# Altium PCB HD1772.pcbdoc
Units mm, origin at the board's own origin, x right, y up, seen from the top; angles counter-clockwise.
Board outline 21.34 x 39.62 mm, 2 copper layers (TopLayer, BottomLayer), stack 1.572 mm thick; 8 components, 31 nets, 81 pads, 9 vias.
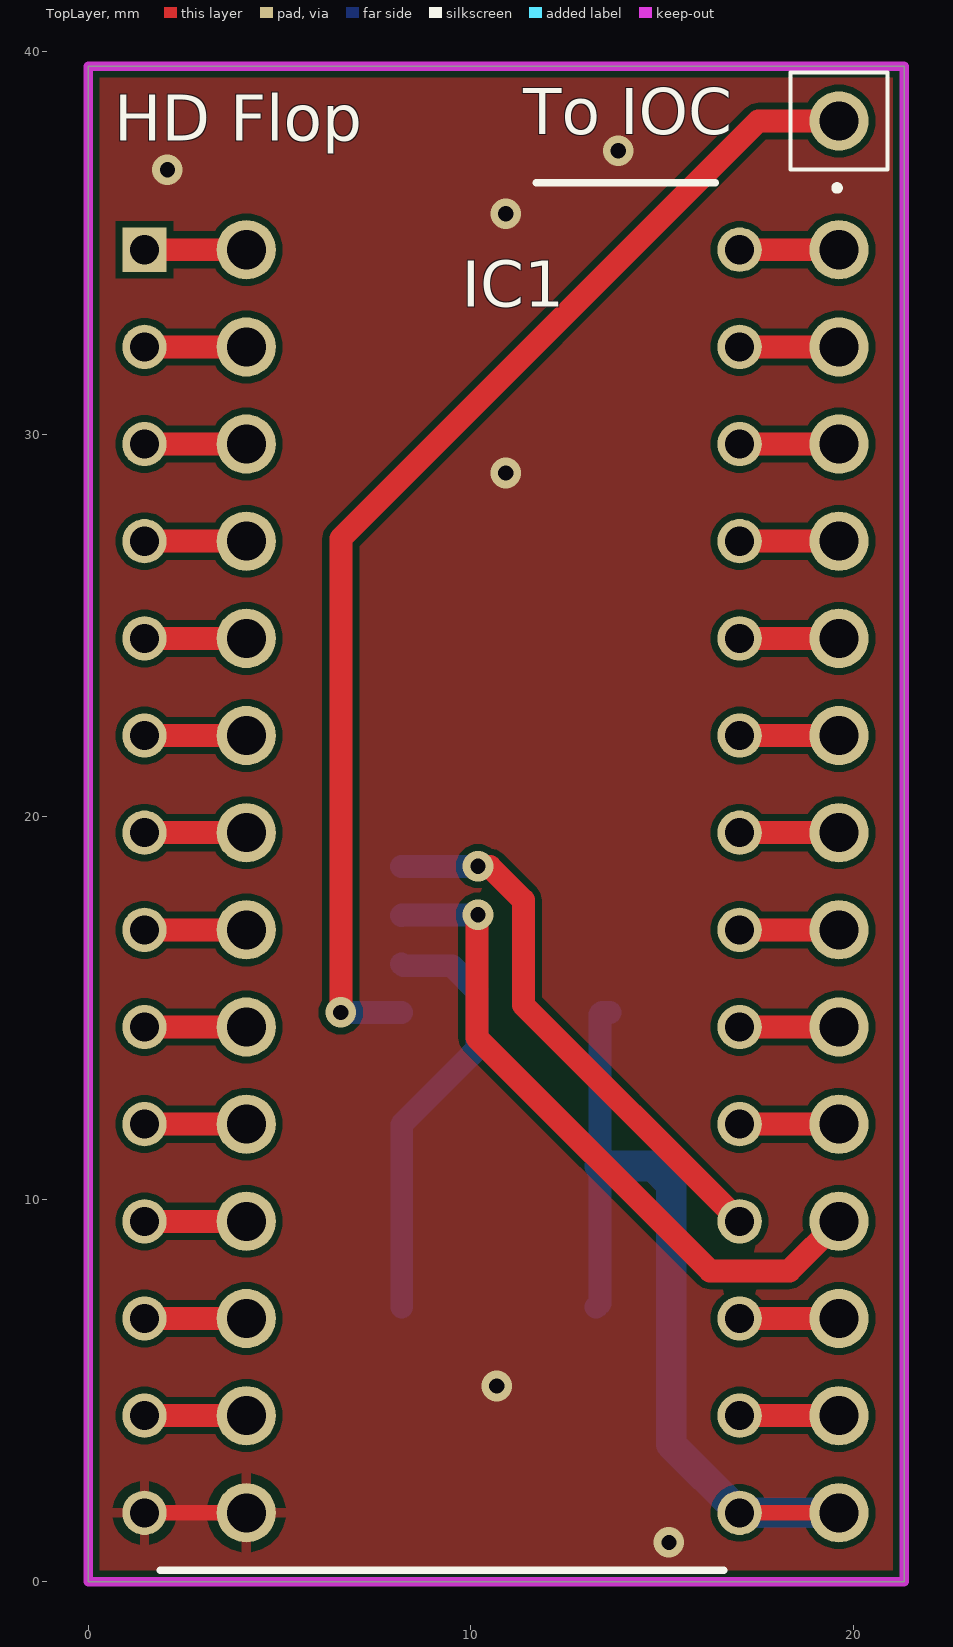
[diagram p0: TopLayer view]
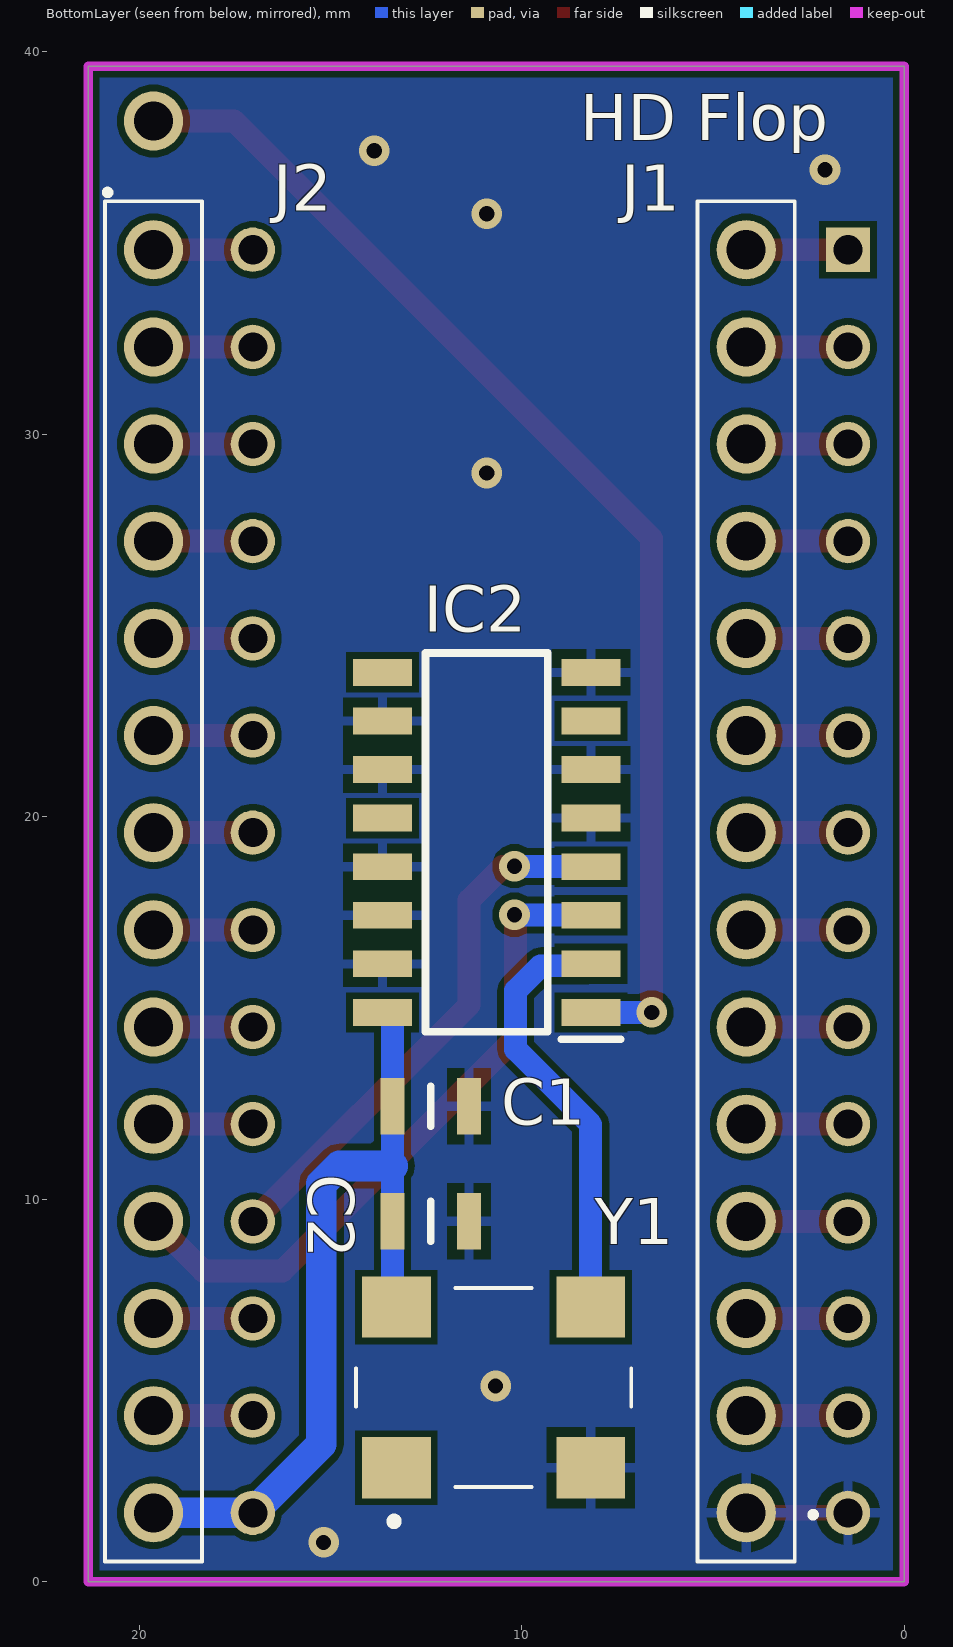
[diagram p1: BottomLayer view, seen from below]
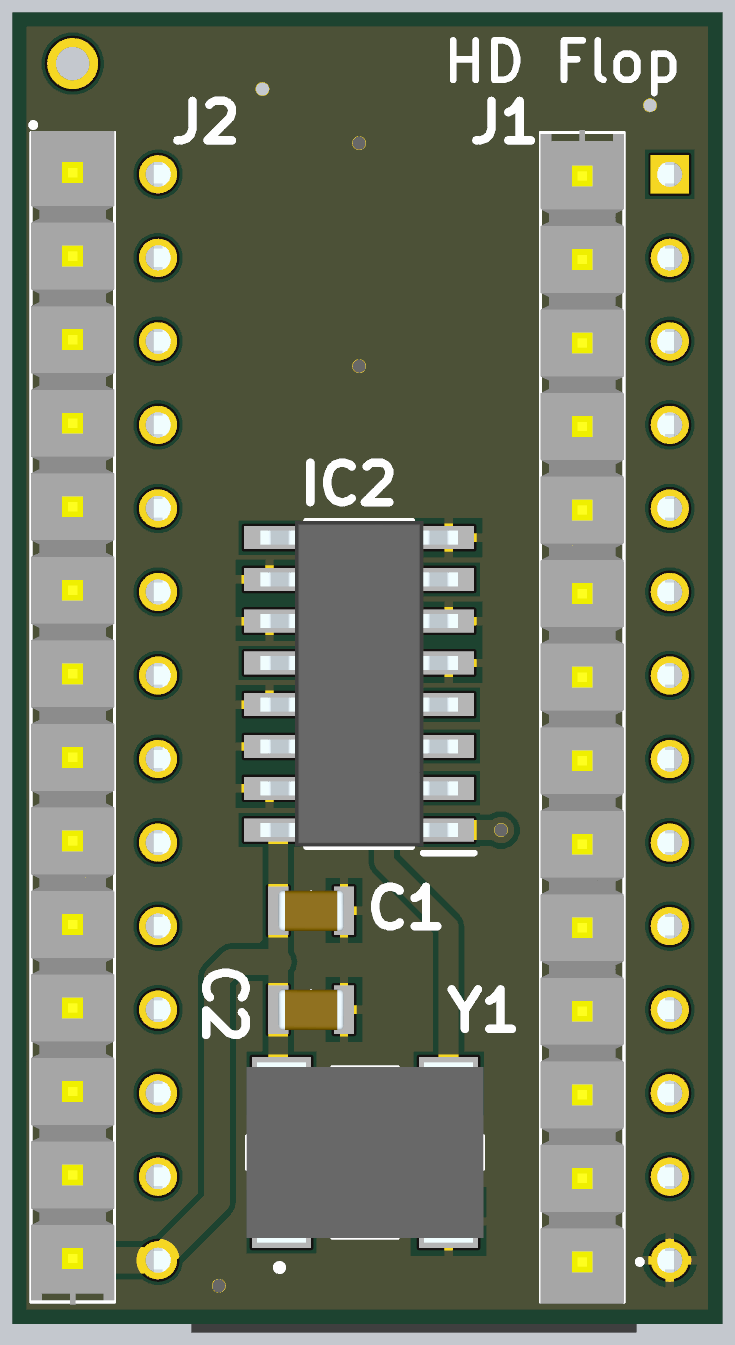
[diagram p2: 3D render of the assembled board from below, using the file's embedded part models]

## Layer stack, top to bottom
TopSolder: solder mask 0.01, Solder Resist, Dk 3.5
TopLayer: signal copper 0.036
Dielectric 2: core 1.5, Core-043, Dk 4.3
BottomLayer: signal copper 0.036
BottomSolder: solder mask 0.01, Solder Resist, Dk 3.5

## Board outline
0,39.624 0,0 21.336,0 21.336,39.624

## Design rules (kind name [scope] priority, off if disabled: settings)
BoardOutlineClearance [All] p1: gap=0.3 ignorepadtopadclearanceinfootprint=FALSE
Clearance [All] p1: gap=0.17 ignorepadtopadclearanceinfootprint=FALSE except(0.3: Via-Via; 0.5: Via-Hole)
ComponentClearance ComponentClearance_Z2_Z3 [(InComponent('Z2') OR InComponent('Z3')) vs InComponent('No Component')] p1: gap=0 collisioncheckmode=3 verticalgap=0 showdistances=FALSE
ComponentClearance ComponentClearance_U4_J104 [All] p2: gap=0 collisioncheckmode=3 verticalgap=0 showdistances=FALSE
ComponentClearance ComponentClearance_J3_J4 [InComponent('J3') vs InComponent('J4')] p3: gap=0 collisioncheckmode=3 verticalgap=0 showdistances=FALSE
ComponentClearance ComponentClearance_J103_J104 [InComponent('J103') vs InComponent('J104')] p4: gap=0 collisioncheckmode=3 verticalgap=0 showdistances=FALSE
ComponentClearance [All] p5: gap=0.254 collisioncheckmode=3 verticalgap=0.254 showdistances=FALSE
DiffPairsRouting [InDifferentialPairClass('All Differential Pairs')] p1: maxlimit=0.254 minlimit=0.17 mostfreqgap=0.17 toplayer_minwidth=0.2 toplayer_maxwidth=0.381 toplayer_prefwidth=0.237 bottomlayer_minwidth=0.2 bottomlayer_maxwidth=0.381 bottomlayer_prefwidth=0.237 maxuncoupledlength=12.7
FabricationTestPointUsage TestPointUsage [All] p1: valid=0 allowmultiple=FALSE
FabricationTestpoint Testpoint [All] p1: side=3 testpointundercomponent=TRUE minsize=1.016 maxsize=2.54 preferedsize=1.524 minholesize=0.508 maxholesize=1.016 preferedholesize=0.813 testpointgrid=0.025 allowsidetop=TRUE allowsidebottom=TRUE usegrid=TRUE gridtolerance=0
HoleSize [All] p1: absolutevalues=TRUE maxlimit=5 minlimit=0.4 maxpercent=80.000 minpercent=20.000
HoleToHoleClearance [All] p1: gap=0.25 allowstackedmicrovias=FALSE
MinimumSolderMaskSliver [All] p1: minsoldermaskwidth=0.02
PlaneClearance [All] p1: clearance=0.2
PlaneConnect [All] p1: pad.planeconnectstyle=Relief pad.reliefexpansion=0.508 pad.reliefentries=4 pad.reliefconductorwidth=0.254 pad.reliefairgap=0.254 via.planeconnectstyle=Direct via.reliefexpansion=0.508 via.reliefentries=4 via.reliefconductorwidth=0.254 via.reliefairgap=0.254
PolygonConnect [All] p1: thpad.connectstyle=Relief thpad.reliefconductorwidth=0.254 thpad.reliefentries=4 thpad.polygonreliefangle="90 Angle" thpad.airgapwidth=0.254 smdpad.connectstyle=Relief smdpad.reliefconductorwidth=0.254 smdpad.reliefentries=4 smdpad.polygonreliefangle="90 Angle" smdpad.airgapwidth=0.254 via.connectstyle=Direct via.reliefconductorwidth=0.254 via.reliefentries=4 via.polygonreliefangle="90 Angle" via.airgapwidth=0.254
RoutingVias [All] p1: holewidth=0.4 width=0.8 viastyle="Through Hole" minholewidth=0.4 minwidth=0.6 maxholewidth=0.4 maxwidth=0.8
SilkToSilkClearance [All] p1: silktosilkclearance=0.1
SilkToSolderMaskClearance SilkscreenOverComponentPads [IsPad] p1: minsilkscreentomaskgap=0.1 clearancetoexposedcopper=TRUE
SolderMaskExpansion [All] p1: expansion=0.075 istentingtop=FALSE
Width [All] p1: maxlimit=5 minlimit=0.15 preferedwidth=0.2
19 further rules are at their usual default settings.

## Components (designator, comment, footprint, x,y, rotation, side; value= is the part's Value field where it differs from the comment)
C1 "100nF" CAPC2012X145N 12.378,12.433 r180 bottom
C2 "100nF" CAPC2012X145N 12.378,9.425 r0 bottom
IC1 "WD1772" DIP1556W56P254L3740H635Q28N 9.252,18.315 r0 top locked
IC2 "SN74HCT157DR" SOIC127P600X175-16N 10.918,19.331 r0 bottom
J1 "TSW-114-07-G-S" TSW-114-XX-YY-S 4.134,1.805 r90 bottom locked
J2 "TSW-114-07-G-S" TSW-114-XX-YY-S 19.628,34.825 r270 bottom locked
"To IOC" "To IOC pin 47" TSW-101-XX-YY-S 19.628,38.19 r0 top (schematic designator J3)
Y1 "LFSPXO018034REEL" LFSPXO018034REEL 10.738,5.082 r180 bottom

## Footprints (in the part's own frame and the unit in brackets; to place one, negate y for a bottom-side part, rotate by r counter-clockwise, add the part's x,y. Pads: shape width x height; smd on the part's side, far side on the other; paste and mask are expansions set on the pad)
CAPC2012X145N [mm]
  rect 0.62x1.47 smd: 1(-1,0) 2(1,0)
  silkscreen extent 0,-0.53 0,0.53, body extent -1,-0.63 1,0.63, height 1.45
DIP1556W56P254L3740H635Q28N [mm]
  rect 1.16x1.16 hole 0.76: 1(-7.78,16.51)
  round 1.16 hole 0.76: 2(-7.78,13.97) 3(-7.78,11.43) 4(-7.78,8.89) 5(-7.78,6.35) 6(-7.78,3.81) 7(-7.78,1.27) 8(-7.78,-1.27) 9(-7.78,-3.81) 10(-7.78,-6.35) 11(-7.78,-8.89) 12(-7.78,-11.43) 13(-7.78,-13.97) 14(-7.78,-16.51) 15(7.78,-16.51) 16(7.78,-13.97) 17(7.78,-11.43) 18(7.78,-8.89) 19(7.78,-6.35) 20(7.78,-3.81) 21(7.78,-1.27) 22(7.78,1.27) 23(7.78,3.81) 24(7.78,6.35) 25(7.78,8.89) 26(7.78,11.43) 27(7.78,13.97) 28(7.78,16.51)
  silkscreen extent -7.36,-18.01 7.36,18.26, body extent -7.92,-18.7 7.92,18.7, height 6.35
LFSPXO018034REEL [mm]
  rect 1.8x1.6 smd: 1(-2.54,-2.1) 2(2.54,-2.1) 3(2.54,2.1) 4(-2.54,2.1)
  silkscreen extent -3.6,-3.6 3.6,2.6, body extent -3.6,-2.74 3.6,2.74, height 1.5
SOIC127P600X175-16N [mm]
  rect 1.55x0.7 smd: 1(-2.725,4.445) 2(-2.725,3.175) 3(-2.725,1.905) 4(-2.725,0.635) 5(-2.725,-0.635) 6(-2.725,-1.905) 7(-2.725,-3.175) 8(-2.725,-4.445) 9(2.725,-4.445) 10(2.725,-3.175) 11(2.725,-1.905) 12(2.725,-0.635) 13(2.725,0.635) 14(2.725,1.905) 15(2.725,3.175) 16(2.725,4.445)
  silkscreen extent -3.5,-4.95 1.6,5.15, body extent -3,-4.95 3,4.95, height 1.75
TSW-101-XX-YY-S [mm]
  round 1.55 hole 1.02: 1(0,0)
  silkscreen extent -1.27,-1.8 1.27,1.27
TSW-114-XX-YY-S [mm]
  round 1.55 hole 1.02: 1(0,0) 2(2.54,0) 3(5.08,0) 4(7.62,0) 5(10.16,0) 6(12.7,0) 7(15.24,0) 8(17.78,0) 9(20.32,0) 10(22.86,0) 11(25.4,0) 12(27.94,0) 13(30.48,0) 14(33.02,0)
  silkscreen extent -1.27,-1.8 34.29,1.27, body extent -1.32,-1.27 34.37,1.27, height 8.38

## Part data
C1 C2: library part C2012X7R1H104K125AM, "Capacitor", Manufacturer_Name=TDK, Mouser Part Number=810-C2012X7R1H104KT5, Arrow Part Number=C2012X7R1H104K125AM, Arrow Price/Stock=https://www.arrow.com/en/products/c2012x7r1h104k125am/tdk, Datasheet Link=https://product.tdk.com/info/en/catalog/datasheets/mlcc_commercial_midvoltage_en.pdf, Height=1.45mm, Manufacturer_Part_Number=C2012X7R1H104K125AM, Mouser Price/Stock=https://www.mouser.com/Search/Refine.aspx?Keyword=810-C2012X7R1H104KT5
IC1: "Integrated Circuit", Height=6.35mm, Manufacturer_Part_Number=WD1772
IC2: "Integrated Circuit", Manufacturer_Name="Texas Instruments", Mouser Part Number=595-SN74HCT157DR, Arrow Part Number=SN74HCT157DR, Arrow Price/Stock=https://www.arrow.com/en/products/sn74hct157dr/texas-instruments, Datasheet Link=http://www.ti.com/lit/ds/symlink/sn74hct157.pdf, Height=1.75mm, Manufacturer_Part_Number=SN74HCT157DR, Mouser Price/Stock=https://www.mouser.co.uk/ProductDetail/Texas-Instruments/SN74HCT157DR?qs=SL3LIuy2dWwDjupbumH9IA%3D%3D
J1 J2: "Connector", Manufacturer_Name=SAMTEC, Mouser Part Number=200-TSW11407GS, Datasheet Link=http://suddendocs.samtec.com/prints/tsw-xxx-xx-xxx-x-xx-xxx-mkt.pdf, Manufacturer_Part_Number=TSW-114-07-G-S, Mouser Price/Stock=https://www.mouser.co.uk/ProductDetail/Samtec/TSW-114-07-G-S?qs=rU5fayqh%252BE2%2Ft1%252BlziCVkQ%3D%3D
"To IOC": library part TSW-101-07-G-S, "Connector", Manufacturer_Name=SAMTEC, Mouser Part Number=200-TSW10107GS, Arrow Part Number=TSW-101-07-G-S, Arrow Price/Stock=https://www.arrow.com/en/products/tsw-101-07-g-s/samtec?region=europe, Datasheet Link=http://suddendocs.samtec.com/prints/tsw-xxx-xx-xxx-x-xx-xxx-mkt.pdf, Manufacturer_Part_Number=TSW-101-07-G-S, Mouser Price/Stock=https://www.mouser.co.uk/ProductDetail/Samtec/TSW-101-07-G-S?qs=hzq9O0YpnZscfPe5oPvABA%3D%3D
Y1: "Crystal or Oscillator", Manufacturer_Name=IQD, Mouser Part Number=449-LFSPXO018034REEL, Datasheet Link=https://componentsearchengine.com/Datasheets/1/LFSPXO018034Reel.pdf, Height=1.4mm, Manufacturer_Part_Number=LFSPXO018034REEL, Mouser Price/Stock=https://www.mouser.co.uk/ProductDetail/IQD/LFSPXO018034Reel?qs=nFovR%252B4R4UNGKBIfMWn6Ew%3D%3D

## Via types
v1: diameter 0.8, hole 0.4, TopLayer to BottomLayer, tented both sides, 9 vias

## Nets (pads, with @x,y where several pads share a name; then routed paths per layer and width w, separated by ;. In a path a pad name is that pad's centre, name@x,y a point inside that pad or via, vN(x,y) a via of type N, cw(c..) or ccw(c..) an arc to the next point about the centre after c; other vN are vias at no path point)
8MHZ_IN: IC2.3 J2.11 | length 17.7
  TopLayer w0.6: v1@10.16,17.426 10.16,14.224 16.256,8.128 18.331,8.128 J2.11
  BottomLayer w0.6: IC2.3 8.2,17.433 10.184,17.433 v1(10.191,17.44)
CLKOUT: IC1.18 IC2.4 | length 14.3
  TopLayer w0.6: v1@10.16,18.696 10.502,18.696 11.378,17.82 11.378,15.079 IC1.18
  BottomLayer w0.6: IC2.4 8.2,18.703 10.184,18.703 v1(10.191,18.71)
GND: C1.2 C2.1 IC1.14 IC2.5 IC2.6 IC2.8 IC2.10 IC2.11 IC2.13 IC2.14 IC2.15 J1.1 Y1.2 | length 2.7
  TopLayer w0.4: IC1.14 J1.1
  other v1: 15.182,1.03 10.685,5.12 10.918,28.988 10.918,35.77 2.072,36.92 13.858,37.415
NetIC1_1: IC1.1 J1.14 | length 2.7
  TopLayer w0.6: IC1.1 J1.14
NetIC1_2: IC1.2 J1.13 | length 2.7
  TopLayer w0.6: IC1.2 J1.13
NetIC1_3: IC1.3 J1.12 | length 2.7
  TopLayer w0.6: IC1.3 J1.12
NetIC1_4: IC1.4 J1.11 | length 2.7
  TopLayer w0.6: IC1.4 J1.11
NetIC1_5: IC1.5 J1.10 | length 2.7
  TopLayer w0.6: IC1.5 J1.10
NetIC1_6: IC1.6 J1.9 | length 2.7
  TopLayer w0.6: IC1.6 J1.9
NetIC1_7: IC1.7 J1.8 | length 2.7
  TopLayer w0.6: IC1.7 J1.8
NetIC1_8: IC1.8 J1.7 | length 2.7
  TopLayer w0.6: IC1.8 J1.7
NetIC1_9: IC1.9 J1.6 | length 2.7
  TopLayer w0.6: IC1.9 J1.6
NetIC1_10: IC1.10 J1.5 | length 2.7
  TopLayer w0.6: IC1.10 J1.5
NetIC1_11: IC1.11 J1.4 | length 2.7
  TopLayer w0.6: IC1.11 J1.4
NetIC1_12: IC1.12 J1.3 | length 2.7
  TopLayer w0.6: IC1.12 J1.3
NetIC1_13: IC1.13 J1.2 | length 2.7
  TopLayer w0.6: IC1.13 J1.2
NetIC1_16: IC1.16 J2.13 | length 2.6
  TopLayer w0.6: IC1.16 J2.13
NetIC1_17: IC1.17 J2.12 | length 2.6
  TopLayer w0.6: IC1.17 J2.12
NetIC1_19: IC1.19 J2.10 | length 2.6
  TopLayer w0.6: IC1.19 J2.10
NetIC1_20: IC1.20 J2.9 | length 2.6
  TopLayer w0.6: IC1.20 J2.9
NetIC1_21: IC1.21 J2.8 | length 2.6
  TopLayer w0.6: IC1.21 J2.8
NetIC1_22: IC1.22 J2.7 | length 2.6
  TopLayer w0.6: IC1.22 J2.7
NetIC1_23: IC1.23 J2.6 | length 2.6
  TopLayer w0.6: IC1.23 J2.6
NetIC1_24: IC1.24 J2.5 | length 2.6
  TopLayer w0.6: IC1.24 J2.5
NetIC1_25: IC1.25 J2.4 | length 2.6
  TopLayer w0.6: IC1.25 J2.4
NetIC1_26: IC1.26 J2.3 | length 2.6
  TopLayer w0.6: IC1.26 J2.3
NetIC1_27: IC1.27 J2.2 | length 2.6
  TopLayer w0.6: IC1.27 J2.2
NetIC1_28: IC1.28 J2.1 | length 2.6
  TopLayer w0.6: IC1.28 J2.1
NetIC2_1: "To IOC.1" IC2.1 | length 31.5
  TopLayer w0.6: v1(6.604,14.886) 6.604,27.276 17.518,38.19 19.628,38.19
  BottomLayer w0.6: v1(6.604,14.886) IC2.1
NetIC2_2: IC2.2 Y1.3 | length 11.3
  BottomLayer w0.6: IC2.2 8.243,16.106 9.509,16.106 10.16,15.454 10.16,13.921 8.198,11.959 Y1.3
VCC: C1.1 C2.2 IC1.15 IC2.16 J2.14 Y1.4 | length 24.6
  TopLayer w0.4: IC1.15 J2.14
  BottomLayer w0.6: Y1.4 13.378,7.282 13.378,10.872 13.378,14.836 13.428,14.886 IC2.16
  BottomLayer w0.8: 13.378,10.872 14.771,10.872 15.24,10.403 15.24,3.597 IC1.15 J2.14
pads on no net: IC2.7 IC2.9 IC2.12 Y1.1

## Polygon pours and split planes (outlines as drawn)
GND on BottomLayer "NONET_L-01_P-001" (solid, remove dead copper, pour order 0): 0,0 21.336,0 21.336,39.624 0,39.624
GND on TopLayer "NONET_L-01_P-001" (solid, remove dead copper, pour order 1): 0,0 21.336,0 21.336,39.624 0,39.624

## Keep-outs
KeepOutLayer:
  the board outline again, w0.254

## Silkscreen, mask and mechanical layers (free items; w line width, h text height)
TopOverlay:
  text "HD Flop" at 0.682,37.671 h1.2
BottomOverlay:
  text "HD Flop" at 8.477,37.684 h1.2
Shape:
  the board outline again, w0.254